# EAGLE board optodist 1.1 (EAGLE 6.5.0)
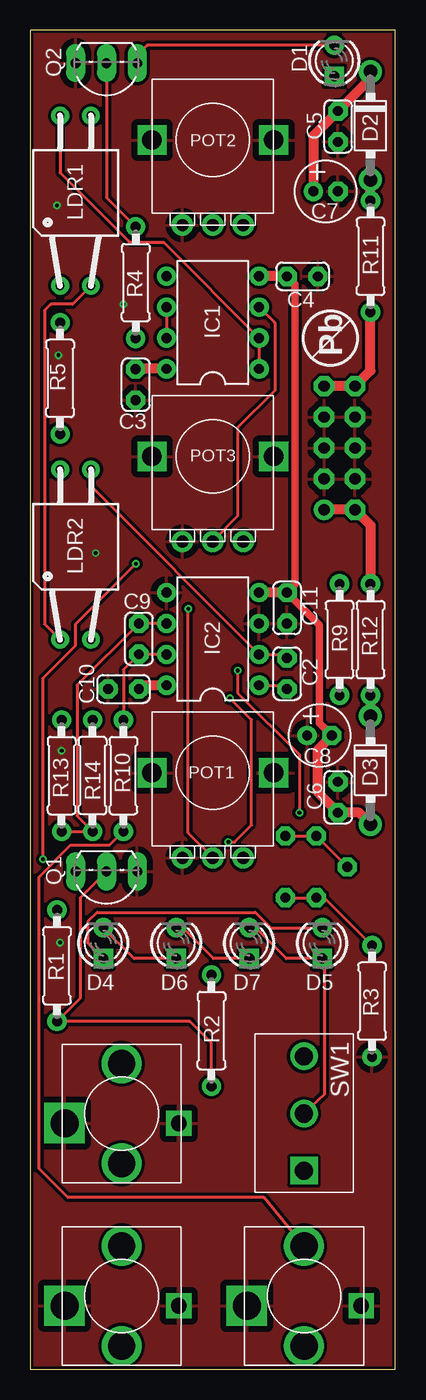
[diagram p0: board, top side]
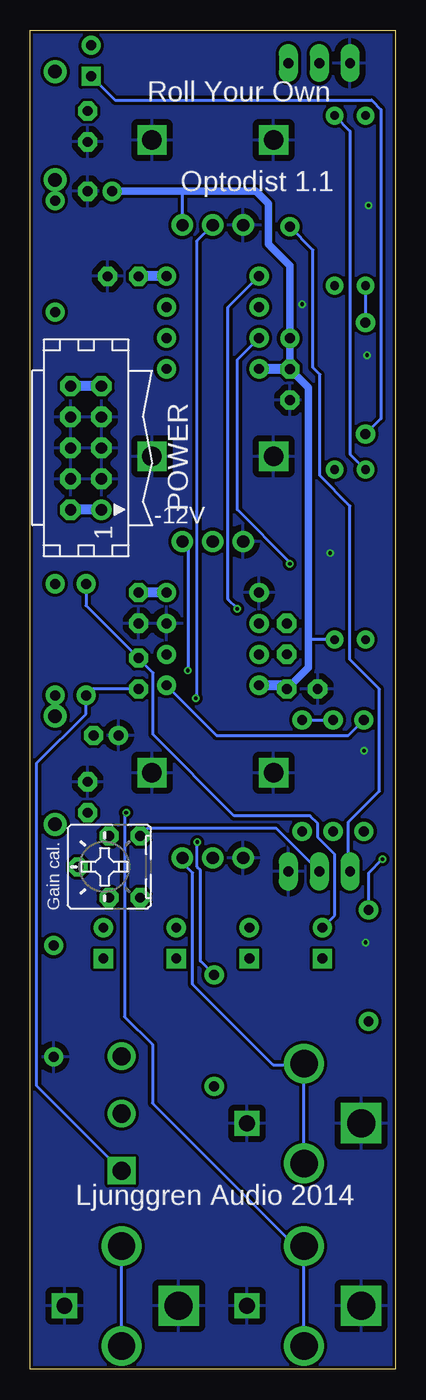
[diagram p1: board, bottom side, seen from below]

Size 30 x 110 mm. Coordinates in mm from the lower left corner, seen from the top.
Outline: 30,0 30,110 0,110 0,0 30,0
Copper layers (1*16): Top 0.035mm / dielectric 1.5mm / Bottom 0.035mm
Design rules "hackvana 15 mil pads 20 mil thermal": minimum track width 6mil, minimum drill 0.3mm, track to track 6mil, track to pad 6mil, pad to pad 6mil, via to via 6mil, smd to smd 0mil, copper to edge 6mil, drill to drill 6mil, minimum pad ring 15mil, minimum via ring 6mil, stop-mask expansion 2mil, vias tented up to drill 100mil, thermal gap 20mil

## Footprints (pad centres in the part's own frame; a part is rotated, then mirrored left to right if it is on the bottom)
C025-024X044 = drill 0.813 octagon: 1 -1.27,0; 2 1.27,0
E2-5 = drill 0.813 pad 1.27: + -1.016,0 | drill 0.813 pad 1.27 octagon: - 1.016,0
ERTHENVAR = drill 2.3 pad 3 square: RING1 -4.7,-0.8 | drill 1.3 pad 1.778 square: RING2 4.7,-0.8 | drill 2.25 pad 3: SHUNT 0,-4.1; TIP 0,4.1
LED3MM = drill 0.813 square: A -1.27,0 | drill 0.813: K 1.27,0
DO41-7 = drill 1.118: A 4.445,0; C -4.445,0
DIL08 = drill 0.813 pad 1.27: 1 -3.81,-3.81; 2 -1.27,-3.81; 3 1.27,-3.81; 4 3.81,-3.81; 5 3.81,3.81; 6 1.27,3.81; 7 -1.27,3.81; 8 -3.81,3.81
VTL5C = drill 0.7 pad 1.3: 1 -7.62,1.27; 2 -7.62,-1.27; 3 6.35,1.27; 4 6.35,-1.27
POT-ALPHA9 = drill 1.6 pad 2.184 square: GND$1 -5,0; GND$2 5,0 | drill 1: LEFT -2.5,-7; MID 0,-7; RIGHT 2.5,-7
CON10L = drill 0.914: 1 5.08,1.27 | drill 0.914 octagon: 2 5.08,-1.27; 3 2.54,1.27; 4 2.54,-1.27; 5 0,1.27; 6 0,-1.27; 7 -2.54,1.27; 8 -2.54,-1.27; 9 -5.08,1.27; 10 -5.08,-1.27
TO92-LINE = drill 0.813 long: 1 2.54,0; 2 0,0; 3 -2.54,0
0207/9 = drill 0.813: 1 -4.58,0; 2 4.58,0
SPDT-HORIZONTAL-TOP-SUBMINI-MULTICOMP = drill 1.5 square: 1 4.7,0 | drill 1.5: 2 0,0; 3 -4.7,0
B25P = drill 0.813 octagon: A -2.54,0; AA -2.54,-2.54; E 2.54,0; EE 2.54,-2.54; S 0,2.54

## Placement (x,y rotation side)
C2  100pF  [C025-024X044]  21.11,57.15 270 top
C3  100nF  [C025-024X044]  8.66,80.9 270 top
C4  100nF  [C025-024X044]  22.38,89.79 180 top
C5  100nF  [C025-024X044]  25.3,102.11 270 top
C6  100nF  [C025-024X044]  25.3,46.99 270 top
C7  10uF  [E2-5]  24.29,96.77 0 top
C8  10uF  [E2-5]  23.78,52.07 0 top
C9  100pF  [C025-024X044]  8.92,60.01 270 top
C10  100nF  [C025-024X044]  7.65,55.88 180 top
C11  100nF  [C025-024X044]  21.11,62.55 90 top
CV  ERTHENVAR_3.5MM_JACKHOLES  [ERTHENVAR]  7.5,21 0 top
D1  [LED3MM]  25,107.5 90 top
D2  SB130  [DO41-7]  27.97,102.17 270 top
D3  SB130  [DO41-7]  27.97,49.21 270 top
D4  [LED3MM]  6,35 90 top
D5  [LED3MM]  24,35 90 top
D6  [LED3MM]  12,35 90 top
D7  [LED3MM]  18,35 90 top
IC1  TL072  [DIL08]  15,86 90 top
IC2  TL072  [DIL08]  15,60 90 top
IN  ERTHENVAR_3.5MM_JACKHOLES  [ERTHENVAR]  7.5,6 0 top
LDR1  SR2/SR3  [VTL5C]  3.71,96.65 90 top
LDR2  SR2/SR3  [VTL5C]  3.71,67.56 90 top
OUT  ERTHENVAR_3.5MM_JACKHOLES  [ERTHENVAR]  22.5,6 0 top
POT1  B100K  [POT-ALPHA9]  15,49 0 top
POT2  B22K/B25K  [POT-ALPHA9]  15,101 0 top
POT3  A100K  [POT-ALPHA9]  15,75 0 top
POWER  [CON10L]  25.43,75.69 270 bottom
Q1  BC557B  [TO92-LINE]  6.25,40.89 180 top
Q2  BC547B  [TO92-LINE]  6.25,107.31 180 top
R1  68K  [0207/9]  2.19,33.15 270 top
R2  100K  [0207/9]  14.89,27.81 270 top
R3  100R  [0207/9]  28.09,30.23 90 top
R4  4.7M  [0207/9]  8.66,89.28 270 top
R5  1K  [0207/9]  2.44,81.41 90 top
R9  68K  [0207/9]  25.43,59.94 90 top
R10  1K  [0207/9]  7.65,48.77 270 top
R11  10R  [0207/9]  27.97,91.44 90 top
R12  10R  [0207/9]  27.97,59.94 270 top
R13  10K  [0207/9]  2.57,48.77 270 top
R14  10K  [0207/9]  5.11,48.77 90 top
SW1  ON-OFF  [SPDT-HORIZONTAL-TOP-SUBMINI-MULTICOMP]  22.5,21 270 top
TRIM1  2K  [B25P]  23.52,41.27 90 bottom

## Library data of the parts
C2-C11 CV D1-D7 IC1 IC2 IN OUT POT1-POT3 Q1 Q2 R1-R5 R9-R14 SW1 TRIM1 = Roll Your Own
LDR1 LDR2 = Roll Your Own; MF: VACTEC PHOTO; MPN: VTL5C9; OC_FARNELL: 2067857; OC_NEWARK: 95F9033
POWER = Roll Your Own; OC_FARNELL: unknown; OC_NEWARK: unknown

## Nets
0V: C3.2 C4.1 C5.2 C6.1 C7.- C8.+ C10.2 C11.1 CV.RING1 CV.RING2 IC2.3 IC2.5 IN.RING1 IN.RING2 OUT.RING1 OUT.RING2 POT1.GND$1 POT1.GND$2 POT1.LEFT POT2.GND$1 POT2.GND$2 POT2.LEFT POT3.GND$1 POT3.GND$2 POT3.LEFT POWER.3 POWER.4 POWER.5 POWER.6 POWER.7 POWER.8 Q1.3 Q2.1 R3.1
+12V: C3.1 C5.1 C7.+ C10.1 D2.C IC1.8 IC2.8 LDR2.2 POT2.RIGHT R4.2
-12V: C4.2 C6.2 C8.- C11.2 D3.A IC1.4 IC2.4
AUDIO_IN: IC1.3 POT3.MID
AUDIO_OUT: C2.2 IC2.1 R9.1 R13.1 SW1.1
CV_IN: D1.A R5.1
N$1: IC1.6 IC1.7 R1.1
N$2: POT2.MID R2.1
N$3: Q1.2 R1.2 R2.2 TRIM1.E TRIM1.EE TRIM1.S
N$4: Q1.1 Q2.2 R4.1
N$5: CV.SHUNT CV.TIP POT1.RIGHT
N$6: D1.K Q2.3
N$7: R3.2 TRIM1.A TRIM1.AA
N$8: IN.SHUNT IN.TIP POT3.RIGHT
N$9: OUT.SHUNT OUT.TIP R10.2
N$10: IC1.1 IC1.2 LDR1.3
N$12: C2.1 D4.K D6.A IC2.2 LDR2.4 R9.2
N$13: LDR1.1 R5.2
N$14: LDR1.2 LDR2.1
N$15: LDR1.4 LDR2.3
N$16: D2.A R11.2
N$17: C9.2 IC2.7 R10.1 R14.2
N$18: POWER.1 POWER.2 R12.1
N$19: POWER.9 POWER.10 R11.1
N$20: D3.C R12.2
N$21: C9.1 IC2.6 R13.2 R14.1
N$22: IC1.5 POT1.MID
N$25: D4.A D5.K
N$26: D6.K D7.A
N$27: D5.A D7.K SW1.2

## Tracks (layer width: path | path; a pad name or v marks a point on that pad's centre or on a via)
0V  (via drill 0.3)
  other vias: 2.19,95.63 2.31,83.31 7.65,87.5 5.36,67.06 2.44,35.05 2.57,50.8
  pour Top (isolate 0.254): 0,0 0,110 30,110 30,0
  pour Bottom (isolate 0.254): 0.03,0 0.03,109.98 30,109.98 30,0
+12V
  Top 0.813: D2.C 27.97,106.05 C5.1 23.27,101.35 C7.+ | IC1.8 9.45,82.19 8.79,82.17 | IC2.8 9.42,56.19 9.36,56.13
  Bottom 0.254: POT2.RIGHT 17.5,96.7 17.43,96.77 | LDR2.2 7.14,59.94
  Bottom 0.61: C7.+ 17.43,96.77 11.46,96.77 10.44,95.76 10.44,92.46 8.66,90.68 R4.2 C3.1 7.14,80.64 7.14,59.94 7.14,57.66 C10.1
  Bottom 0.813: C3.1 11.17,82.17 IC1.8 | C10.1 9.23,56.19 IC2.8
-12V
  Top 0.61: C8.- 23.78,53.09 23.78,61.15 C11.2 21.75,64.45 21.75,89.15 C4.2
  Top 0.813: D3.A 27.02,45.72 C6.2 23.65,47.37 23.65,50.93 C8.- | C11.2 19.33,63.82 | C4.2 19.33,89.79
  Bottom 0.813: IC2.4 C11.2 | C4.2 18.83,89.79 IC1.4
AUDIO_IN
  Top 0.254: IC1.3 20.09,85.99 20.09,80.39 17.05,77.34 17.05,70.1 15,68.06 POT3.MID
AUDIO_OUT
  Top 0.254: IC2.1 20.8,56.19 C2.2
  Bottom 0.254: C2.2 24.91,55.88 R9.1 25.43,53.85 29.49,49.78 29.49,23.29 SW1.1 | IC2.1 14.69,52.07 3.85,52.07 R13.1
CV_IN
  Bottom 0.254: D1.A 23.04,104.27 1.93,104.27 1.17,103.5 1.17,78.1 R5.1
N$1  (via drill 0.3)
  Top 0.254: IC1.6 IC1.7 | v1.04,41.91 1.04,56.77 3.71,59.44 3.71,61.21 v8.66,66.17
  Bottom 0.254: R1.1 2.19,40.77 v1.04,41.91 | v8.66,66.17 8.66,66.29 12.98,70.61 12.98,82.94 IC1.7
N$2  (via drill 0.3)
  Top 0.254: v16.28,43.31 16.79,43.31 18.19,44.7 18.19,53.34 v16.41,55.12
  Bottom 0.254: R2.1 16.03,33.53 16.03,41.02 16.28,41.27 v16.28,43.31 | v16.41,55.12 16.28,55.24 16.28,92.72 POT2.MID
N$3
  Top 0.254: TRIM1.S TRIM1.E TRIM1.EE | R2.2 14.89,26.8 13.11,28.57 R1.2 4.09,30.47 4.09,38.73 Q1.2
  Bottom 0.254: TRIM1.EE 20.35,44.45 9.81,44.45 Q1.2
N$4
  Top 0.254: Q2.2 6.25,96.27 R4.1
  Bottom 0.254: Q1.1 3.84,40.64 3.84,44.96 1.3,47.5 1.3,55.88 3.71,58.29 3.71,70.93 6.19,73.41 6.19,81.72 6.76,82.3 6.76,91.96 R4.1
N$5
  Bottom 0.254: CV.SHUNT CV.TIP 7.6,25 10.04,25 16.66,31.62 16.66,40.78 17.43,41.53 17.43,41.93 POT1.RIGHT
N$6
  Top 0.254: D1.K 9.61,108.77 8.92,108.08 8.92,107.44 Q2.3
N$7
  Top 0.254: TRIM1.AA TRIM1.A 24.17,38.73 R3.2
N$8  (via drill 0.3)
  Top 0.254: v17.05,57.4 17.05,55.56 22.13,50.48 v22.13,45.72
  Bottom 0.254: IN.SHUNT IN.TIP 7.51,10.16 8.28,10.16 19.97,21.84 19.97,26.67 22.25,28.96 22.25,45.59 v22.13,45.72 | POT3.RIGHT 17.05,67.55 v17.05,57.4
N$9
  Top 0.254: OUT.TIP 19.19,14.1 3.08,14.1 0.73,16.45 0.73,40.45 3.33,43.05 6.51,43.05 R10.2
  Bottom 0.254: OUT.SHUNT OUT.TIP
N$10
  Top 0.254: LDR1.3 2.44,98.3 8.16,92.58 10.96,92.58 IC1.2 IC1.1
N$12
  Top 0.254: C2.1 20.8,58.73 IC2.2 4.98,72.56 LDR2.4 | D6.A 8.54,33.73 D4.K
  Bottom 0.254: R9.2 25.43,62.74 C2.1 19.9,57.21 19.9,52.13 13.24,45.47 7.01,45.47 6.38,44.83 6.38,43.69 4.98,42.29 4.98,37.29 D4.K
N$13
  Bottom 0.254: LDR1.1 R5.2
N$14
  Top 0.254: LDR1.2 3.46,87.5 1.68,87.5 1.17,87 1.17,61.21 LDR2.1
N$15
  Bottom 0.254: LDR1.4 3.71,101.73 3.71,75.18 LDR2.3
N$16
  Top 0.813: R11.2 D2.A
N$17
  Top 0.254: IC2.7 C9.2 7.65,57.47 R10.1
  Bottom 0.254: R10.1 R14.2
N$18
  Top 0.813: POWER.1 POWER.2 27.97,69.34 R12.1
  Bottom 0.813: POWER.1 26.19,70.61
N$19
  Top 0.813: POWER.9 POWER.10 27.97,82.04 R11.1
  Bottom 0.813: POWER.9 26.19,80.77
N$20
  Top 0.813: R12.2 D3.C
N$21
  Top 0.254: IC2.6 C9.1 3.84,56.2 3.84,45.46 R14.1 R13.2
N$22  (via drill 0.3)
  Top 0.254: POT1.MID 15,42.05 12.98,44.07 v12.98,62.48
  Bottom 0.254: v12.98,62.48 13.74,63.25 13.74,87.26 IC1.5
N$25
  Top 0.254: D5.K 19.77,36.27 18.51,37.53 5.49,37.53 4.73,36.77 4.73,35 D4.A
N$26
  Top 0.254: D7.A 15.05,33.73 12.6,36.2 12.07,36.2 D6.K
N$27
  Top 0.254: D7.K 18.07,36.2 18.57,36.2 21.05,33.73 D5.A 24.16,33.57 24.16,22.56 SW1.2

## Text on the board
tPlace: Pb
bPlace: Roll Your Own | Optodist 1.1 | -12V | Gain cal. | Ljunggren Audio 2014